# Altium PCB BMS PCB.PcbDoc (part 2 of 2)
Units mil, origin at the board's own origin, x right, y up, seen from the top; angles counter-clockwise.
Board outline 2280 x 3625.91 mil, 4 copper layers (TOP, L2, L3, BOTTOM), stack 62.449 mil thick; 104 components, 71 nets, 301 pads, 582 vias.
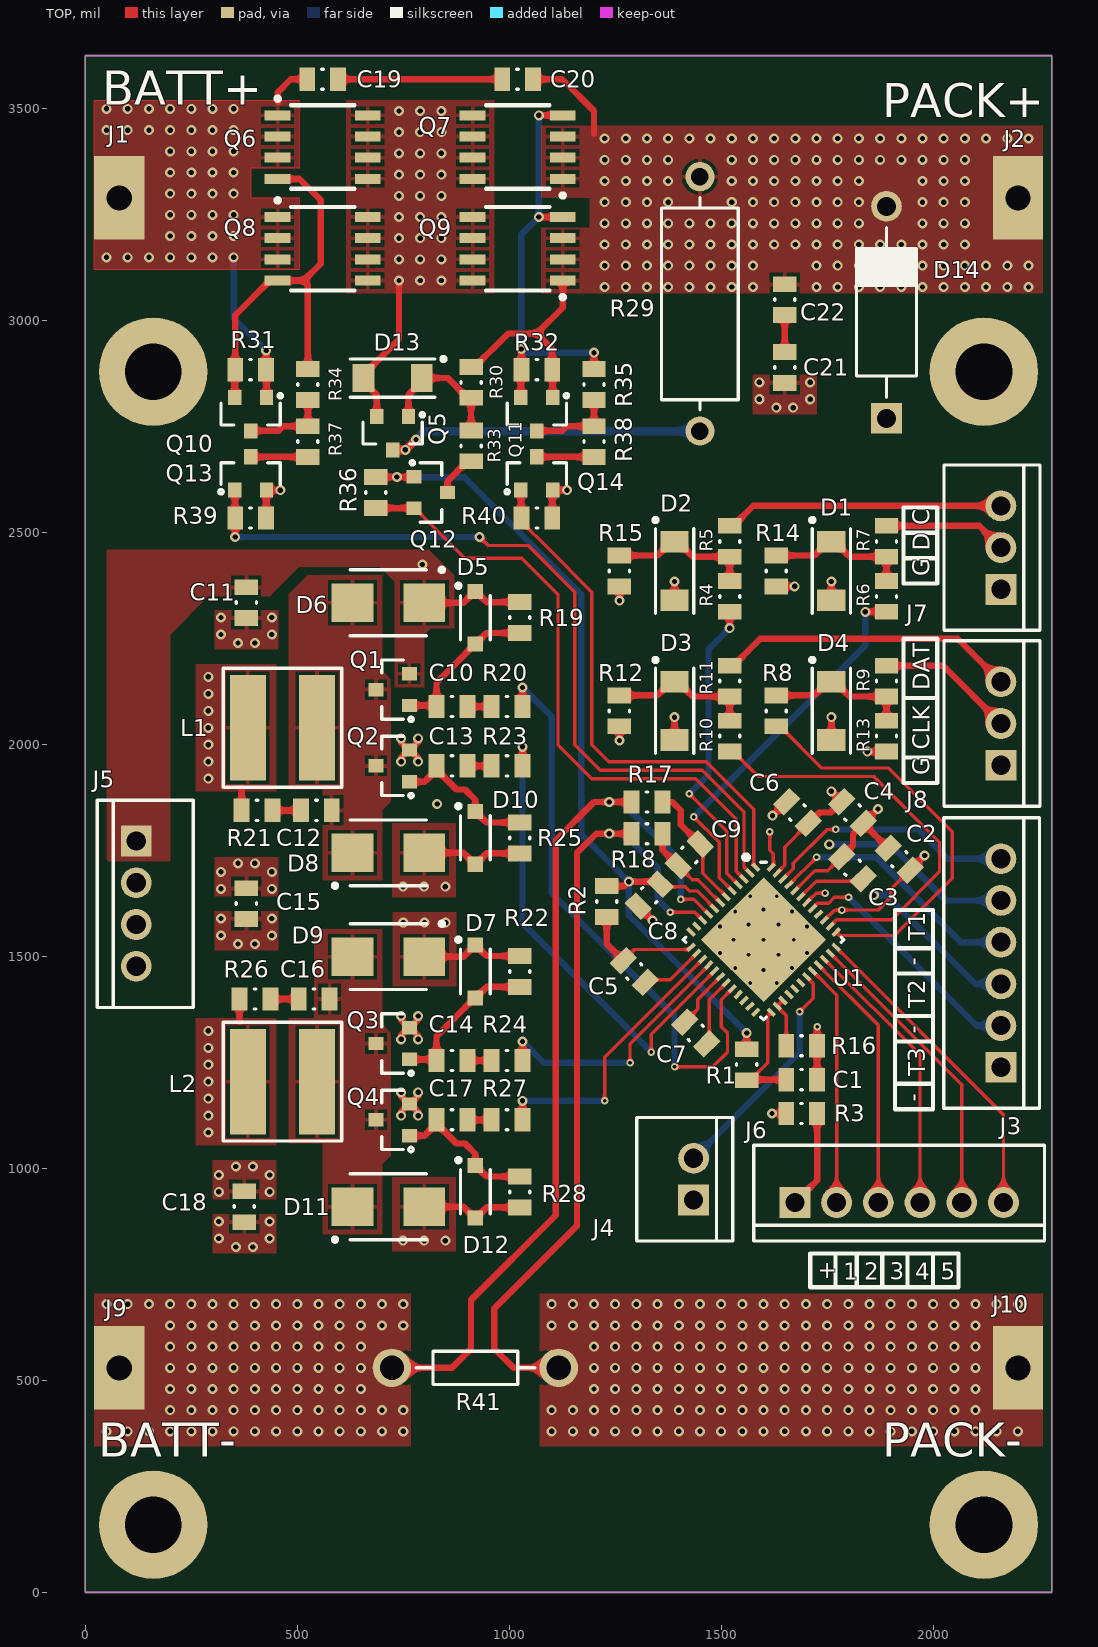
[diagram p0: TOP view]

## Part data (continued)
R37 R38: library part "RES 0805 220K", "Res Thick Film 0805 220K Ohm 5% 1/8W ±200ppm/°C Molded SMD SMD Paper T/R", Case Code (Imperial)=0805, Case Code (Metric)=2012, Manufacturer="Vishay Dale", Manufacturer Part Number=CRCW0805220KJNEA, Max Operating Temperature=155°C, Max Power Dissipation=125mW, Min Operating Temperature=-55°C, Package Quantity=1, Resistance=220kR, Resistance Tolerance=5%, Resistor Type="Thick Film", Temperature Coefficient=200ppm/°C, Voltage Rating=150V, Case/Package=0805, Category="Chip SMD Resistors", ComponentLink1Description=https://datasheet.ciiva.com/2464/dcrcwe3-2464864.pdf?src-supplier=Digi-Key, ComponentLink1URL=https://datasheet.ciiva.com/2464/dcrcwe3-2464864.pdf?src-supplier=Digi-Key, ComponentLink2Description=https://datasheet.ciiva.com/2464/dcrcwe3-2464865.pdf?src-supplier=Digi-Key, ComponentLink2URL=https://datasheet.ciiva.com/2464/dcrcwe3-2464865.pdf?src-supplier=Digi-Key, ComponentLink3Description=https://datasheet.ciiva.com/2464/dcrcwe3-2464866.pdf?src-supplier=Digi-Key, ComponentLink3URL=https://datasheet.ciiva.com/2464/dcrcwe3-2464866.pdf?src-supplier=Digi-Key, ComponentLink4Description=https://datasheet.ciiva.com/3258/dcrcwe3-3258325.pdf?src-supplier=Avnet, ComponentLink4URL=https://datasheet.ciiva.com/3258/dcrcwe3-3258325.pdf?src-supplier=Avnet, ComponentLink5Description=https://datasheet.ciiva.com/28606/1747939-28606759.pdf?src-supplier=Element14, ComponentLink5URL=https://datasheet.ciiva.com/28606/1747939-28606759.pdf?src-supplier=Element14, ComponentLink6Description=https://datasheet.ciiva.com/16498/dcrcw-16498286.pdf?src-supplier=Future+Electronics, ComponentLink6URL=https://datasheet.ciiva.com/16498/dcrcw-16498286.pdf?src-supplier=Future+Electronics, Construction=Rectangular, Contact Plating=Tin, Depth=1.25mm, Features="Automotive AEC-Q200", Height=0.02inch, Lead Free="Lead Free", Length=2mm, Military Standard=Not, Mount="Surface Mount", Number of Terminations=2, Packaging="Tape and Reel", Power Rating=125mW, Pricing 1="1=0,05510, 10=0,03660, 25=0,03490, 50=0,03450, 100=0,02070, 250=0,01310 (USD)", Radiation Hardening=No, REACH SVHC=Unknown, RoHS=Yes, RoHS Compliant=Yes, Series=CRCW, Size Code=0805, Stock 1=277, Supplier 1="Arrow Electronics", Supplier Part Number 1=CRCW0805220KJNEA, Termination=SMD/SMT, Tolerance=5%, Voltage Rating (DC)=150V, Weight=0.000194oz, Width=0.049inch
R41: library part "SHUNT 10m"
U1: library part BQ78PL116RGZT, "PowerLAN Master gateway controller with PowerPump cell Balancing technology 48-VQFN -40 to 85", Case/Package=VQFN, Manufacturer="Texas Instruments", Max Operating Temperature=85°C, Max Supply Voltage=4.5V, Min Operating Temperature=-40°C, Min Supply Voltage=2.5V, Operating Supply Voltage=3.6V, Output Voltage=400mV, Package Quantity=1, Category="Battery Management", ComponentLink1Description=https://datasheet.ciiva.com/4873/slusab8b-128725-4873339.pdf?src-supplier=Mouser, ComponentLink1URL=https://datasheet.ciiva.com/4873/slusab8b-128725-4873339.pdf?src-supplier=Mouser, ComponentLink2Description=https://datasheet.ciiva.com/15115/getdatasheetpartid-551675-15115367.pdf?src-supplier=Verical, ComponentLink2URL=https://datasheet.ciiva.com/15115/getdatasheetpartid-551675-15115367.pdf?src-supplier=Verical, ComponentLink3Description=https://datasheet.ciiva.com/3213/bq78pl116-3213329.pdf?src-supplier=Avnet, ComponentLink3URL=https://datasheet.ciiva.com/3213/bq78pl116-3213329.pdf?src-supplier=Avnet, ComponentLink4Description=https://datasheet.ciiva.com/1932/bq78pl116-1932797.pdf?src-supplier=Digi-Key, ComponentLink4URL=https://datasheet.ciiva.com/1932/bq78pl116-1932797.pdf?src-supplier=Digi-Key, ComponentLink5Description=https://datasheet.ciiva.com/1932/bq78pl116-1932796.pdf?src-supplier=Digi-Key, ComponentLink5URL=https://datasheet.ciiva.com/1932/bq78pl116-1932796.pdf?src-supplier=Digi-Key, ComponentLink6Description=https://datasheet.ciiva.com/1932/bq78pl116-1932798.pdf?src-supplier=Digi-Key, ComponentLink6URL=https://datasheet.ciiva.com/1932/bq78pl116-1932798.pdf?src-supplier=Digi-Key, Contact Plating=Gold, Interface=SMBus, Lead Free="Lead Free", Manufacturer Part Number=BQ78PL116RGZT, Mount="Surface Mount", Number of Pins=48, Packaging="Tape and Reel", Pricing 1="1=18,11000, 10=17,30000, 25=16,85000 (USD)", Radiation Hardening=No, REACH SVHC="No SVHC", RoHS=Yes, RoHS Compliant=Yes, Series="PowerLAN™, PowerPump™", Stock 1=58, Supplier 1="Arrow Electronics", Supplier Part Number 1=BQ78PL116RGZT, Weight=0.004938oz

## Free pads (board coordinates)
  round 255.91 hole 133.86 unplated: 3(160,2880) 4(2120,2880) 5(160,160) 6(2120,160)

## Via types
v1: diameter 23.62, hole 12.6, TOP to BOTTOM, tented both sides, 545 vias
v2: diameter 0/0/0/19.68 (per signal layer), hole 9.06, TOP to BOTTOM, tented both sides, 21 vias
v3: diameter 17.72, hole 8.66, TOP to BOTTOM, tented both sides, 16 vias

## Nets (pads, with @x,y where several pads share a name; then routed paths per layer and width w, separated by ;. In a path a pad name is that pad's centre, name@x,y a point inside that pad or via, vN(x,y) a via of type N, cw(c..) or ccw(c..) an arc to the next point about the centre after c; other vN are vias at no path point)
BATT+: C19.1 J1.1 Q6.1 Q6.2 Q6.3 Q8.1 Q8.2 Q8.3 Q10.1 R31.2 | length 469.8
  TOP w15: v1(426.42,2930) R31.2 427.4,2884.02 Q10.1 ; 455,3515 453.7,3516.3 453.7,3538.7 485,3570 C19.1
  BOTTOM w15: v1(350,3150) 350,3006.42 v1(426.42,2930)
  other v1: 50,3150 100,3150 150,3150 200,3150 250,3150 300,3150 200,3200 250,3200 300,3200 350,3200 200,3250 250,3250 300,3250 350,3250 200,3300 250,3300 300,3300 350,3300 200,3350 250,3350 300,3350 350,3350 200,3400 250,3400 300,3400 350,3400 50,3450 100,3450 150,3450 200,3450 250,3450 300,3450 350,3450 50,3500 100,3500 150,3500 200,3500 250,3500 300,3500 350,3500
BATT-: J9.1 R17.1 R41.1 U1.9 | length 2101.3
  TOP w8: v3(1405,1635) 1435.4,1635 U1.9
  TOP w15: R41.1 865,530 910,575 910,690 1110,890 1110,1775 1200,1865 v1(1236,1865) R17.1
  BOTTOM w15: v1(1236,1865) 1265,1865 1405,1725 v3(1405,1635)
  other v1: 50,380 100,380 150,380 200,380 250,380 300,380 350,380 400,380 450,380 500,380 550,380 600,380 650,380 700,380 750,380 200,430 250,430 300,430 350,430 400,430 450,430 500,430 550,430 600,430 650,430 700,430 750,430 200,480 250,480 300,480 350,480 400,480 450,480 500,480 550,480 600,480 650,480 200,530 250,530 300,530 350,530 400,530 450,530 500,530 550,530 600,530 650,530 200,580 250,580 300,580 350,580 400,580 450,580 500,580 550,580 600,580 650,580 200,630 250,630 300,630 350,630 400,630 450,630 500,630 550,630 600,630 650,630 700,630 750,630 50,680 100,680 150,680 200,680 250,680 300,680 350,680 400,680 450,680 500,680 550,680 600,680 650,680 700,680 750,680
BUTTON: J4.2 U1.31 | length 551.5
  TOP w8: v3(1685,1370) 1717.3,1402.3 1717.3,1436.62 U1.31
  BOTTOM w15: J4.2 1685,1274.21 v3(1685,1370)
CHG: Q14.1 R40.2 U1.1 | length 1253.2
  TOP w8: R40.2 1028.58,2526.14 1090.49,2464.24 1090.76,2464.24 1195,2360 1195,2000 1235,1960 1465,1960 1576.89,1848.11 1576.89,1716.22 U1.1
  TOP w15: Q14.1 1028.09,2600.14 R40.2@1028.09,2535.49
CLK: R8.1 U1.37 | length 961
  TOP w8: R8.1 1638.86,2043.58 1737.44,1945 1895,1945 2045,1795 2045,1685 1910,1550 1779.3,1550 U1.37
CLK1: D4.2 R8.2 R9.1 R13.2 | length 345.2
  TOP w15: R8.2 1719.65,2116.42 1752.13,2148.9 D4.2 1767.87,2148.9 1803.19,2113.58 R9.1 R13.2
DAT: R10.1 U1.38 | length 964.2
  TOP w8: R10.1 1528.86,1983.58 1587.44,1925 1860,1925 2015,1770 2015,1700 1902,1587 1772.27,1587 U1.38
DAT1: D3.2 R10.2 R11.1 R12.2 | length 345.2
  TOP w15: R12.2 1349.65,2116.42 1382.13,2148.9 D3.2 1397.87,2148.9 1433.19,2113.58 R11.1 R10.2
DSG: Q13.1 R39.2 U1.2 | length 1940.7
  TOP w8: v1(930,2490) 950,2470 1045,2470 1155,2360 1155,2000 1215,1940 1455,1940 1554,1841 1554,1711.27 U1.2
  TOP w15: Q13.1 353.09,2600.14 353.09,2535.49 R39.2 v1(353.58,2490)
  BOTTOM w15: v1(353.58,2490) v1(930,2490)
EFC: R4.1 U1.4 | length 731.2
  TOP w8: v3(1425,1884.38) 1513.34,1796.04 1513.34,1696.26 U1.4
  TOP w15: v1(1520,2275) R4.1
  BOTTOM w15: v3(1425,1884.38) 1470,1929.38 1470,2225 v1(1520,2275)
EFC1: D2.2 R4.2 R5.1 R15.2 | length 345.2
  TOP w15: R15.2 1349.65,2446.42 1382.13,2478.9 D2.2 1397.87,2478.9 1433.19,2443.58 R5.1 R4.2
EFCIC: J7.3 R5.2 | length 659.5
  TOP w15: R5.2 1528.86,2516.42 1575.87,2563.43 J7.3
EFCID: J7.2 R7.2 | length 291.3
  TOP w15: R7.2 2108.58,2516.42 J7.2
EFD: R6.1 U1.5 | length 913.2
  TOP w8: v3(1435.49,1829.51) 1495.34,1769.66 1495.34,1686.42 U1.5
  TOP w15: v1(1840,2313.58) R6.1
  BOTTOM w15: v3(1435.49,1829.51) 1840,2234.02 v1(1840,2313.58)
EFD1: D1.2 R6.2 R7.1 R14.2 | length 345.2
  TOP w15: R14.2 1719.65,2446.42 1752.13,2478.9 D1.2 1767.87,2478.9 1803.19,2443.58 R7.1 R6.2
GND: C21.2 D1.1 D2.1 D3.1 D4.1 D14.1 J7.1 J8.1 J10.1 R18.1 R41.2 U1.10 | length 2112.1
  TOP w8: v3(1380,1605) 1437.56,1605 U1.10
  TOP w15: R41.2 1010,530 965,575 965,670 1160,865 1160,1745 1205,1790 v1(1236,1790) R18.1 ; D3.1 v1(1390,2065) ; D2.1 v1(1390,2385) ; D4.1 1749.27,2021.83 1760,2032.55 v1(1760,2065) ; D1.1@1760,2351.1 v1(1760,2385)
  BOTTOM w15: v1(1236,1790) 1270,1790 1350,1710 1350,1635 v3(1380,1605)
  other v1: 1100,380 1150,380 1200,380 1250,380 1300,380 1350,380 1400,380 1450,380 1500,380 1550,380 1600,380 1650,380 1700,380 1750,380 1800,380 1850,380 1900,380 1950,380 2000,380 2050,380 2100,380 2150,380 2200,380 1100,430 1150,430 1200,430 1250,430 1300,430 1350,430 1400,430 1450,430 1500,430 1550,430 1600,430 1650,430 1700,430 1750,430 1800,430 1850,430 1900,430 1950,430 2000,430 2050,430 2100,430 1200,480 1250,480 1300,480 1350,480 1400,480 1450,480 1500,480 1550,480 1600,480 1650,480 1700,480 1750,480 1800,480 1850,480 1900,480 1950,480 2000,480 2050,480 2100,480 1200,530 1250,530 1300,530 1350,530 1400,530 1450,530 1500,530 1550,530 1600,530 1650,530 1700,530 1750,530 1800,530 1850,530 1900,530 1950,530 2000,530 2050,530 2100,530 1200,580 1250,580 1300,580 1350,580 1400,580 1450,580 1500,580 1550,580 1600,580 1650,580 1700,580 1750,580 1800,580 1850,580 1900,580 1950,580 2000,580 2050,580 2100,580 1100,630 1150,630 1200,630 1250,630 1300,630 1350,630 1400,630 1450,630 1500,630 1550,630 1600,630 1650,630 1700,630 1750,630 1800,630 1850,630 1900,630 1950,630 2000,630 2050,630 2100,630 1100,680 1150,680 1200,680 1250,680 1300,680 1350,680 1400,680 1450,680 1500,680 1550,680 1600,680 1650,680 1700,680 1750,680 1800,680 1850,680 1900,680 1950,680 2000,680 2050,680 2100,680 2150,680 2200,680 1630,2795 1670,2795 1590,2815 1710,2815 1590,2855 1710,2855
LED1: J6.2 U1.32 | length 569.8
  TOP w8: U1.32 1772.36,1409.4 J6.2
LED2: J6.3 U1.33 | length 618.7
  TOP w8: U1.33 1870.79,1338.81 J6.3
LED3: J6.4 U1.34 | length 667.6
  TOP w8: U1.34 1969.21,1268.22 J6.4
LED4: J6.5 U1.35 | length 716.5
  TOP w8: U1.35 2067.64,1197.64 J6.5
LED5: J6.6 U1.36 | length 765.5
  TOP w8: U1.36 2166.06,1127.05 J6.6
"LED ANODE": J6.1 R3.2 | length 231.7
  TOP w15: J6.1 1726.42,972.48 R3.2
NetC1_1: C1.1 R1.1 U1.25 | length 272.8
  TOP w8: R1.1 1561.42,1210 1570.28,1210 1610,1249.72 1610,1360.7 U1.25
  TOP w15: R1.1@1570.28,1210 C1.1
NetC5_1: C5.1 U1.14 | length 150.4
  TOP w8: C5.1 1327.01,1445.51 1380.24,1445.51 U1.14
NetC7_1: C7.1 U1.18 | length 141.4
  TOP w8: C7.1 1445,1376.5 1445,1398.92 U1.18
NetC7_2: C7.2 U1.19 | length 163.4
  TOP w8: C7.2 1472.01,1300.51 1472.01,1398.1 U1.19
NetC9_1: C9.1 R17.2 U1.6 | length 299.7
  TOP w8: C9.1 1457.01,1759.49 1457.01,1696.9 U1.6
  TOP w15: R17.2 1385,1865 1405,1845 1405,1811.5 C9.1
NetC9_2: C9.2 R18.2 U1.7 | length 226.4
  TOP w8: C9.2 1432.2,1681.3 1444.78,1681.3 U1.7
  TOP w15: R18.2 1361.42,1752.08 C9.2
NetC10_1: C10.1 R20.2 | length 57.2
  TOP w15: C10.1 R20.2
NetC10_2: C10.2 D5.1 Q1.1 R19.1 | length 365.8
  TOP w15: Q1.1 C10.2@825.98,2092.6 ; C10.2 C10.2@825.98,2092.6 ; R19.1 946.57,2263.58 920.98,2237.99 D5.1 919.02,2237.99 908.8,2227.78 908.8,2226.79 828.58,2146.57 828.58,2095.2 C10.2@825.98,2092.6
NetC12_1: C12.1 D6.1 D8.2 L1.1 Q1.3 Q2.3
NetC12_2: C12.2 R21.1 | length 67.2
  TOP w15: R21.1 C12.2
NetC13_1: C13.1 R23.2 | length 57.2
  TOP w15: C13.1 R23.2
NetC13_2: C13.2 D10.2 Q2.1 R25.2 | length 349.4
  TOP w15: Q2.1 800.04,1912.6 C13.2@828.58,1941.14 ; C13.2 C13.2@828.58,1941.14 ; R25.2 946.57,1816.42 920.98,1842.01 D10.2 920,1870 895.74,1894.26 875.46,1894.26 C13.2@828.58,1941.14
NetC14_1: C14.1 D7.1 Q3.1 R22.1 | length 367.3
  TOP w15: Q3.1 825.98,1257.6 C14.1 828.58,1312.56 919.02,1402.99 D7.1 920.98,1402.99 946.57,1428.58 R22.1
NetC14_2: C14.2 R24.1 | length 57.2
  TOP w15: C14.2 R24.1
NetC16_1: C16.1 R26.2 | length 67.2
  TOP w15: R26.2 C16.1
NetC16_2: C16.2 D9.1 D11.2 L2.2 Q3.3 Q4.3
NetC17_1: C17.1 D12.2 Q4.1 R28.2 | length 349.4
  TOP w15: Q4.1 800.04,1077.6 C17.1@828.58,1106.14 ; C17.1 C17.1@828.58,1106.14 ; R28.2 946.57,981.42 920.98,1007.01 D12.2 920,1035 895.74,1059.26 875.46,1059.26 C17.1@828.58,1106.14
NetC17_2: C17.2 R27.1 | length 57.2
  TOP w15: C17.2 R27.1
NetC19_2: C19.2 C20.1 | length 387.2
  TOP w15: C19.2 C20.1
NetC21_1: C21.1 C22.2 | length 87.2
  TOP w15: C21.1 C22.2
NetD13_1: D13.1 Q5.2 Q6.5 Q6.6 Q6.7 Q6.8 Q7.5 Q7.6 Q7.7 Q7.8 Q8.5 Q8.6 Q8.7 Q8.8 Q9.5 Q9.6 Q9.7 Q9.8 | length 368.4
  TOP w15: Q5.2 687.6,2825.63 656.1,2857.13 D13.1 656.1,2872.87 740,2956.77 v1(740,3095)
  other v1: 790,3095 840,3095 740,3145 790,3145 840,3145 740,3195 790,3195 840,3195 740,3245 790,3245 840,3245 740,3295 790,3295 840,3295 740,3345 790,3345 840,3345 740,3395 790,3395 840,3395 740,3445 790,3445 840,3445 740,3495 790,3495 840,3495
NetD13_2: D13.2 Q5.1 R30.1 R33.2 | length 316.2
  TOP w15: Q5.1 762.4,2825.63 793.9,2857.13 D13.2 854.72,2865 901.14,2818.58 R30.1 R33.2
NetQ5_3: Q5.3 R29.1 | length 778.6
  TOP w20: Q5.3 v1(755,2695.63) 755.31,2695.63 779.68,2720 v1(780,2720)
  BOTTOM w20: v1(755,2695.63) 755.63,2695.63 v1(780,2720) ; v1@779.84,2720.16 799.69,2740 R29.1
NetQ6_4: Q6.4 Q8.4 Q10.2 R31.1 R34.2 | length 931.1
  TOP w15: Q10.2 352.6,2884.02 R31.1 353.58,3013.58 435,3095 Q8.4 515,3095 ; Q6.4 505,3335 555,3285 555,3135 515,3095 ; R34.2 525,3085 515,3095
NetQ7_4: Q7.4 Q9.4 Q11.2 R32.2 R35.2 | length 1009.3
  TOP w15: Q11.2 1027.6,2884.02 R32.2 v1(1028.58,2933.58) ; v1(1070,3485) Q7.4 ; v1(1070.02,3245.02) Q9.4 ; R35.2 v1(1200,2925)
  BOTTOM w15: v1(1070,3485) v1(1070.02,3245.02) 1028.58,3203.58 v1(1028.58,2933.58) 1030.92,2933.58 1039.5,2925 v1(1200,2925)
NetQ10_3: Q10.3 R34.1 R37.2 | length 201.6
  TOP w15: Q10.3 455.63,2740.63 466.42,2751.42 R37.2 R34.1
NetQ11_3: Q11.3 R35.1 R38.2 | length 201.6
  TOP w15: Q11.3 1124.83,2740.63 1135.62,2751.42 R38.2 R35.1
NetQ12_3: Q12.3 R33.1 | length 101.8
  TOP w15: Q12.3 854.37,2621.81 901.14,2668.58 R33.1
NetQ13_3: Q13.3 R37.1 | length 135.3
  TOP w15: Q13.3 390.39,2678.98 524.61,2678.98 R37.1
NetQ14_3: Q14.3 R38.1 | length 135.3
  TOP w15: Q14.3 1065.39,2678.98 1199.61,2678.98 R38.1
NetR16_2: R16.2 U1.26 U1.27 | length 121.3
  TOP w8: U1.27 U1.26 1653.58,1361.14 R16.2
P1N: R27.2 U1.15 | length 668.6
  TOP w8: v3(1225,1160) 1225,1262.44 U1.15
  TOP w15: R27.2 v1(1031.42,1160)
  BOTTOM w15: v1(1031.42,1160) v3(1225,1160)
P2N: R23.1 U1.17 | length 1143.9
  TOP w8: v3(1335,1275) 1335,1316.76 U1.17
  TOP w15: R23.1 v1(1031.42,1995)
  BOTTOM w15: v1(1031.42,1995) 1031.42,1578.58 v3(1335,1275)
P2S: R24.2 U1.16 | length 626.3
  TOP w8: v3(1285,1250) 1285,1294.6 U1.16
  TOP w15: R24.2 v1(1031.42,1300)
  BOTTOM w15: v1(1031.42,1300) 1081.42,1250 v3(1285,1250)
P3S: R20.1 U1.20 | length 1394.6
  TOP w8: v3(1390,1240) 1480,1240 1515,1275 1515,1320 1500,1335 1500,1398.24 U1.20
  TOP w15: R20.1 v1(1031.42,2135)
  BOTTOM w15: v1(1031.42,2135) 1100,2066.42 1100,1650 1390,1360 v3(1390,1240)
PACK+: C20.2 C22.1 D14.2 J2.1 Q7.1 Q7.2 Q7.3 Q9.1 Q9.2 Q9.3 Q11.1 R29.2 R30.2 R32.1 | length 760.9
  TOP w15: R30.2 918.86,2891.42 997.44,2970 1065,2970 ; C20.2 1125,3570 1200,3495 1200,3441.11 ; Q11.1 1102.4,2884.02 R32.1 1101.42,2933.58 1065,2970 ; Q9.1 1126.3,3031.3 1065,2970
  BOTTOM w15: J2.1@2180,3270 J2.1
  other v1: 1225,3080 1275,3080 1325,3080 1375,3080 1425,3080 1475,3080 1525,3080 1575,3080 1725,3080 1775,3080 1825,3080 1875,3080 1925,3080 1975,3080 2025,3080 2075,3080 2125,3080 2175,3080 2225,3080 1225,3130 1275,3130 1325,3130 1375,3130 1425,3130 1475,3130 1525,3130 1575,3130 1725,3130 1775,3130 1825,3130 1875,3130 1925,3130 1975,3130 2025,3130 2075,3130 2125,3130 2175,3130 2225,3130 1225,3180 1275,3180 1325,3180 1375,3180 1425,3180 1475,3180 1525,3180 1575,3180 1625,3180 1675,3180 1725,3180 1775,3180 1825,3180 1875,3180 1925,3180 1975,3180 2025,3180 2075,3180 1225,3230 1275,3230 1325,3230 1375,3230 1425,3230 1475,3230 1525,3230 1575,3230 1625,3230 1675,3230 1725,3230 1775,3230 1825,3230 1975,3230 2025,3230 2075,3230 1225,3280 1275,3280 1325,3280 1375,3280 1525,3280 1575,3280 1625,3280 1675,3280 1725,3280 1775,3280 1825,3280 1975,3280 2025,3280 2075,3280 1225,3330 1275,3330 1325,3330 1375,3330 1525,3330 1575,3330 1625,3330 1675,3330 1725,3330 1775,3330 1825,3330 1975,3330 2025,3330 2075,3330 1225,3380 1275,3380 1325,3380 1375,3380 1525,3380 1575,3380 1625,3380 1675,3380 1725,3380 1775,3380 1825,3380 1875,3380 1925,3380 1975,3380 2025,3380 2075,3380 1225,3430 1275,3430 1325,3430 1375,3430 1425,3430 1475,3430 1525,3430 1575,3430 1625,3430 1675,3430 1725,3430 1775,3430 1825,3430 1875,3430 1925,3430 1975,3430 2025,3430 2075,3430 2125,3430 2175,3430 2225,3430
PRE: Q12.2 R36.1 U1.3 | length 1511.3
  TOP w8: Q12.2 777.6,2557.6 895.2,2440 1030,2440 1115,2355 1115,2000 1195,1920 1440,1920 1536,1824 1536,1701.44 U1.3
  TOP w15: R36.1 685.49,2558.09 775.14,2558.09 Q12.2
SDO0: C5.2 R2.1 U1.13 | length 291.5
  TOP w8: C5.2 1295.39,1516.89 1423.78,1516.89 U1.13
  TOP w15: R2.1 1230,1530 C5.2
SMBCLK: J8.2 R9.2 | length 326.5
  TOP w15: R9.2 2023.58,2186.42 J8.2
SMBDAT: J8.3 R11.2 | length 708.4
  TOP w15: R11.2 1528.86,2186.42 1592.44,2250 2058.43,2250 J8.3
TEMP1: J3.6 U1.46 | length 598.3
  TOP w8: U1.46 1670,1707.44 1670,1720 1750,1800 v3(1770.01,1800)
  BOTTOM w15: v3(1770.01,1800) 1965,1800 2033.94,1731.06 J3.6
TEMP2: J3.4 U1.45 | length 610.1
  TOP w8: U1.45 v3(1725,1734.6)
  BOTTOM w15: v3(1725,1734.6) 1865.4,1734.6 2065.79,1534.21 J3.4
TEMP3: J3.2 U1.41 | length 580.7
  TOP w8: U1.41 1728,1626.24 1753.57,1626.24 1767.33,1640 v3(1800.45,1640)
  BOTTOM w15: v3(1800.45,1640) 2103.09,1337.36 J3.2
V1: C4.2 C6.1 C15.2 C18.1 D8.1 D10.1 J5.3 L2.1 Q2.2 R3.1 R25.1 R26.1 U1.47 | length 2656.9
  TOP w8: U1.47 1650,1715.27 1650,1758.5 C6.1
  TOP w15: 363.58,1346.42 R26.1 ; v1(745,1960) 745,1970 Q2.2@762.4,1987.4 ; v1(745,2015) 745,2004.8 Q2.2@762.4,1987.4 ; v1(785,1960) 785,1968.74 Q2.2@766.34,1987.4 ; v1(785,2015) 785,2006.06 Q2.2@766.34,1987.4 ; D8.1 892.01,1745 919.02,1717.99 D10.1 920.98,1717.99 946.57,1743.58 R25.1 ; v1(1620,1130) R3.1 ; C6.1 1731.5,1840 1758.5,1840 C4.2 v1(1760,1890) ; Q2.2@762.4,1987.4 Q2.2 Q2.2@766.34,1987.4
  L2 w15: v1(830,1860) 1100,1860 1160,1920 1730,1920 v1(1760,1890) 1895,1755 1895,1405 v1(1620,1130)
  other v1: 315,945 435,945 315,985 435,985 355,1005 395,1005 290,1085 290,1125 290,1165 290,1205 290,1245 290,1285 290,1325 360,1530 400,1530 320,1550 440,1550 320,1590 440,1590 749.29,1665 799.29,1665 849.29,1665
V2: C2.2 C3.2 C4.1 C11.2 C15.1 D7.2 D9.2 J3.1 J5.2 L1.2 Q3.2 R21.2 R22.2 U1.44 | length 2649.9
  TOP w8: U1.44 1721.28,1703.04 1751.54,1703.04 C3.2
  TOP w15: R21.2 368.58,1898.58 ; v1(745,1305) 745,1315 Q3.2@762.4,1332.4 ; v1(745,1360) 745,1349.8 Q3.2@762.4,1332.4 ; v1(785,1305) 785,1313.74 Q3.2@766.34,1332.4 ; v1(785,1360) 785,1351.06 Q3.2@766.34,1332.4 ; D9.2 892.01,1500 919.02,1527.01 D7.2 920.98,1527.01 946.57,1501.42 R22.2 ; C3.2 1810.96,1762.46 1810.96,1789.46 C4.1 ; v1(1870,1848.5) C4.1 ; C2.2 C4.1 ; Q3.2@762.4,1332.4 Q3.2 Q3.2@766.34,1332.4
  L2 w15: 765,1370 765.9,1370.9 ; 860,2065 1060,2065 1155,1970 1748.5,1970 v1(1870,1848.5) 1940,1778.5 1940,1458.94 J3.1
  other v1: 750,1580 800,1580 850,1580 320,1660 440,1660 320,1700 440,1700 360,1720 400,1720 290,1920 290,1960 290,2000 290,2040 290,2080 290,2120 290,2160 360,2240 400,2240 320,2260 440,2260 320,2300 440,2300
V3: C2.1 C11.1 D5.2 D6.2 J5.1 Q1.2 R19.2 U1.39 U1.42 | length 2261.7
  TOP w8: U1.42 1723.92,1650 v3(1745,1650) ; U1.39 1767.44,1610 v3(1785,1610) 1870,1610 1900,1640 1900,1658.5 C2.1
  TOP w15: D6.2 892.01,2335 919.02,2362.01 D5.2 920.98,2362.01 946.57,2336.42 R19.2 ; C2.1 v1(1980,1738.5)
  L2 w15: v1(795,2425) 1100,2425 1415,2110 1805,2110 1980,1935 v1@1980,1740 ; v3(1745,1650) 1745,1630 1765,1610 v3(1785,1610)
VLDO1: C8.1 Q12.1 R1.2 R2.2 R36.2 U1.8 | length 2160.7
  TOP w8: C8.1 1362.01,1664.49 1415.51,1664.49 1425,1655 1443.24,1655 U1.8
  TOP w15: R36.2 v1(735,2631.42) 774.65,2631.42 Q12.1 ; R2.2 1270.68,1666.42 1281.28,1677.01 v1(1282.01,1677.01) 1349.49,1677.01 C8.1 ; R1.2 v1(1560,1320)
  BOTTOM w15: v1(735,2631.42) 893.58,2631.42 1170,2355 1170,1789.03 v1(1282.01,1677.01) 1282.01,1597.99 v1(1560,1320)
VLDO2: C3.1 U1.43 | length 165.7
  TOP w8: U1.43 1724.07,1677.99 1829.49,1677.99 C3.1
VSS: C1.2 C6.2 C8.2 C18.2 D11.1 D12.1 J3.3 J3.5 J4.1 J5.4 Q4.2 Q13.2 Q14.2 R12.1 R13.1 R14.1 R15.1 R16.1 R28.1 R39.1 R40.1 U1.48 U1.49 | length 2381.6
  TOP w8: v3(1615,1795) 1615,1751.21 1623.11,1743.11 1623.11,1716.22 U1.48
  TOP w15: R39.1 426.91,2535.49 426.91,2600.14 Q13.2 v1(460,2600.63) ; v1(745,1125) 745,1135 Q4.2@762.4,1152.4 ; v1(745,1180) 745,1169.8 Q4.2@762.4,1152.4 ; v1(785,1125) 785,1133.74 Q4.2@766.34,1152.4 ; v1(785,1180) 785,1171.06 Q4.2@766.34,1152.4 ; D11.1 892.01,910 919.02,882.99 D12.1 920.98,882.99 946.57,908.58 R28.1 ; R40.1 1101.42,2540 1101.91,2540.49 1101.91,2600.14 Q14.2 v1(1136.35,2600.63) ; v1(1260,2010) R12.1 ; v1(1260,2340) R15.1 ; C8.2 v1(1338.5,1585) ; v1(1621.24,1832.74) C6.2 ; R14.1 v1(1673.58,2373.58) ; C1.2 R16.1 v3(1726.42,1335) ; v1(1845,1983.58) R13.1 ; Q4.2@762.4,1152.4 Q4.2 Q4.2@766.34,1152.4
  L3 w15: 1260,2535 1512.17,2535 v1(1673.58,2373.58)
  BOTTOM w15: v1(1755,1765) 1898,1765 2030.36,1632.64 J3.5 ; v1(1860,1645) 1890,1645 2099.21,1435.79 J3.3
  other v1: 355,815 395,815 749.29,830 799.29,830 849.29,830 315,835 435,835 315,875 435,875
  other v2: 1568.82,1437.55 1631.18,1437.55 1600,1468.73 1533.19,1473.19 1666.81,1473.19 1564.37,1504.37 1635.63,1504.37 1497.55,1508.82 1702.45,1508.82 1528.73,1540 1600,1540 1671.27,1540 1497.55,1571.18 1702.45,1571.18 1564.37,1575.63 1635.63,1575.63 1533.19,1606.81 1666.81,1606.81 1600,1611.27 1568.82,1642.45 1631.18,1642.45
pads on no net: U1.11 U1.12 U1.21 U1.22 U1.23 U1.24 U1.28 U1.29 U1.30 U1.40

## Polygon pours and split planes (outlines as drawn)
GND on TOP "NONET_L-01_P-001" (solid, pour order 46): 1575,2872.28 1575,2780 1725,2780 1725,2872.28
V1 on TOP "NONET_L-01_P-001" (solid, pour order 45): 450,927.72 450,1020 300,1020 300,927.72
VSS on TOP "NONET_L-01_P-001" (solid, pour order 44): 300,892.28 300,800 450,800 450,892.28
NetC16_2 on TOP "NONET_L-01_P-001" (solid, pour order 40): 480,1355 540,1355 540,1565 700,1565 700,1340 720,1320 720,1030 700,1010 700,960 700,845 560,845 560,1060 480,1060
NetC12_1 on TOP "NONET_L-01_P-001" (solid, pour order 38): 700,2400 700,2175 720,2155 720,1865 700,1845 700,1795 700,1680 560,1680 560,1895 480,1895 480,2355 525,2400
VSS on TOP "NONET_L-01_P-001" (solid, pour order 36): 874.29,805 724.29,805 724.29,980 874.29,980
V1 on TOP "NONET_L-01_P-001" (solid, pour order 35): 874.29,1640 724.29,1640 724.29,1815 874.29,1815
V2 on TOP "NONET_L-01_P-001" (solid, pour order 34): 725,1605 875,1605 875,1430 725,1430
V3 on TOP "NONET_L-01_P-001" (solid, pour order 22): 50,1724.9 50,2460 810,2460 870,2400 870,2275 815,2275 800,2260 800,2135 730,2135 730,2385 695,2420 505,2420 435,2350 290,2350 200,2260 200,1725.1
V1 on TOP "NONET_L-01_P-001" (solid, pour order 27): 260,1355 260,1055 450,1055 450,1355
V1 on TOP "NONET_L-01_P-001" (solid, pour order 26): 305,1607.28 305,1515 455,1515 455,1607.28
V2 on TOP "NONET_L-01_P-001" (solid, pour order 25): 455,1642.72 455,1735 305,1735 305,1642.72
V2 on TOP "NONET_L-01_P-001" (solid, pour order 24): 260,2190 260,1890 450,1890 450,2190
V2 on TOP "NONET_L-01_P-001" (solid, pour order 23): 305,2317.28 305,2225 455,2225 455,2317.28
GND on TOP "NONET_L-01_P-001" (solid, pour order 18): 1071.78,705 2259.05,705 2259.05,345 1071.78,345
BATT- on TOP "NONET_L-01_P-001" (solid, pour order 14): 20.94,705 768.08,705 768.08,345 20.94,345
PACK+ on TOP "NONET_L-01_P-001" (solid, pour order 10): 1075,3220 1190,3220 1190,3290 1075,3290 1075,3460 2259.06,3460 2259.05,3065 1075,3065
no net on TOP "NONET_L-01_P-001" (solid, pour order 2): 20.94,3520 505,3520 505,3360 390,3360 390,3290 505,3290 505,3120 20.94,3120
BATT+ on TOP "NONET_L-01_P-001" (solid, pour order 1): 20.94,3520 505,3520 505,3360 390,3360 390,3290 505,3290 505,3120 20.94,3120
NetD13_1 on TOP "NONET_L-01_P-001" (solid, pour order 6): 615,3520 965,3520 965,3065 615,3065
no net on TOP "NONET_L-01_P-001" (solid, pour order 0): 20,3610
V2 on L2 "NONET_L-01_P-001" (solid, pour order 30): 250,1715 50,1715 50,1635 250,1635 250,1275 925,1275 925,2350 250,2350
GND on L2 "NONET_L-01_P-001" (solid, pour order 19): 1071.8,705 2259.05,705 2259.05,345 1071.8,345
BATT- on L2 "NONET_L-01_P-001" (solid, pour order 15): 20.94,705 768.22,705 768.22,345 20.94,345
PACK+ on L2 "NONET_L-01_P-001" (solid, pour order 11): 1190,3460 2259.06,3460 2259.05,3065 1190,3065
NetD13_1 on L2 "NONET_L-01_P-001" (solid, pour order 7): 720,3520 860,3520 860,3065 720,3065
BATT+ on L2 "NONET_L-01_P-001" (solid, pour order 3): 20.94,3520 390,3520 390,3120 20.94,3120
VSS on L3 "NONET_L-01_P-001" (solid, pour order 43): 820,785 820,345 1020,345 1020,785 1930,785 1930,2005 1295,2005 1295,2655 435,2655 435,2100 980,2100 980,1210 710,1210 710,895 185.1,895 184.91,1520 50,1520 50,785
GND on L3 "NONET_L-01_P-001" (solid, pour order 42): 1365,2045 1365,2475 1565,2475 1565,2880 2259.05,2880 2259.05,700 2025,700 2025,2045
V1 on L3 "NONET_L-01_P-001" (solid, pour order 33): 650,925 650,1260 925,1260 925,2040 250,2040 250,1615 50,1615 50,1535 250,1535 250,925
GND on L3 "NONET_L-01_P-001" (solid, pour order 20): 1071.78,705 2259.05,705 2259.05,345 1071.78,345
BATT- on L3 "NONET_L-01_P-001" (solid, pour order 16): 20.94,705 768.13,705 768.13,345 20.94,345
PACK+ on L3 "NONET_L-01_P-001" (solid, pour order 12): 1190,3460 2259.06,3460 2259.05,3065 1190,3065
NetD13_1 on L3 "NONET_L-01_P-001" (solid, pour order 8): 720,3520 860,3520 860,3065 720,3065
BATT+ on L3 "NONET_L-01_P-001" (solid, pour order 4): 20.94,3520 390,3520 390,3120 20.94,3120
GND on BOTTOM "NONET_L-01_P-001" (solid, pour order 21): 1071.75,705 2259.05,705 2259.05,345 1071.75,345
BATT- on BOTTOM "NONET_L-01_P-001" (solid, pour order 17): 20.94,705 768.2,705 768.2,345 20.94,345
PACK+ on BOTTOM "NONET_L-01_P-001" (solid, pour order 13): 1190,3460 2259.06,3460 2259.05,3065 1190,3065
NetD13_1 on BOTTOM "NONET_L-01_P-001" (solid, pour order 9): 720,3520 860,3520 860,3065 720,3065
BATT+ on BOTTOM "NONET_L-01_P-001" (solid, pour order 5): 20.94,3520 390,3520 390,3120 20.94,3120

## Keep-outs
Keep-Out Layer:
  the board outline again, w3.94

## Silkscreen, mask and mechanical layers (free items; w line width, h text height)
Top Overlay:
  lines w9.84: 1770,720 1770,800 ; 1820,720 1820,800 ; 1880,720 1880,800 ; 1910,1200 2000,1200 ; 1910,1300 2000,1300 ; 1910,1360 1995,1360 ; 1910,1460 2000,1460 ; 1910,1520 2000,1520 ; 1930,1970 2010,1970 ; 1930,2110 2010,2110 ; 1930,2440 2010,2440 ; 1930,2500 2010,2500 ; 1940,720 1940,800 ; 2000,720 2000,800 ; 1710,720 2060,720 2060,800 1710,800 1710,720 ; 1910,1140 1910,1610 2000,1610 2000,1140 1910,1140 ; 1930,1910 1930,2250 2010,2250 2010,1910 1930,1910 ; 1930,2380 2010,2380 2010,2560 1930,2560 1930,2380
  text "BATT+" at 40,3510 h80
  text "PACK+" at 1880,3480 h80
  text "C" at 1992,2518 h40 r90
  text "D" at 1992,2458 h40 r90
  text "G" at 1992,2398 h40 r90
  text "DAT" at 1992,2128 h40 r90
  text "CLK" at 1992,1988 h40 r90
  text "G" at 1992,1928 h40 r90
  text "T1" at 1982,1538 h40 r90
  text "-" at 1971.99,1478 h40 r90
  text "T2" at 1982,1378 h40 r90
  text "-" at 1971.99,1318 h40 r90
  text "T3" at 1982,1218 h40 r90
  text "-" at 1971.99,1158 h40 r90
  text "+" at 1728,741.34 h40
  text "1" at 1788,738 h40
  text "2" at 1838,738 h40
  text "3" at 1898,738 h40
  text "4" at 1958,738 h40
  text "5" at 2018,738 h40
  text "BATT-" at 30,320 h80
  text "PACK-" at 1880,320 h80